# Altium PCB PCB_V1.0.PcbDoc
Units mil, origin at the board's own origin, x right, y up, seen from the top; angles counter-clockwise.
Board outline 3020.03 x 3470.03 mil, 2 copper layers (Top Layer, Bottom Layer), stack 30.315 mil thick; 62 components, 47 nets, 185 pads, 22 vias.
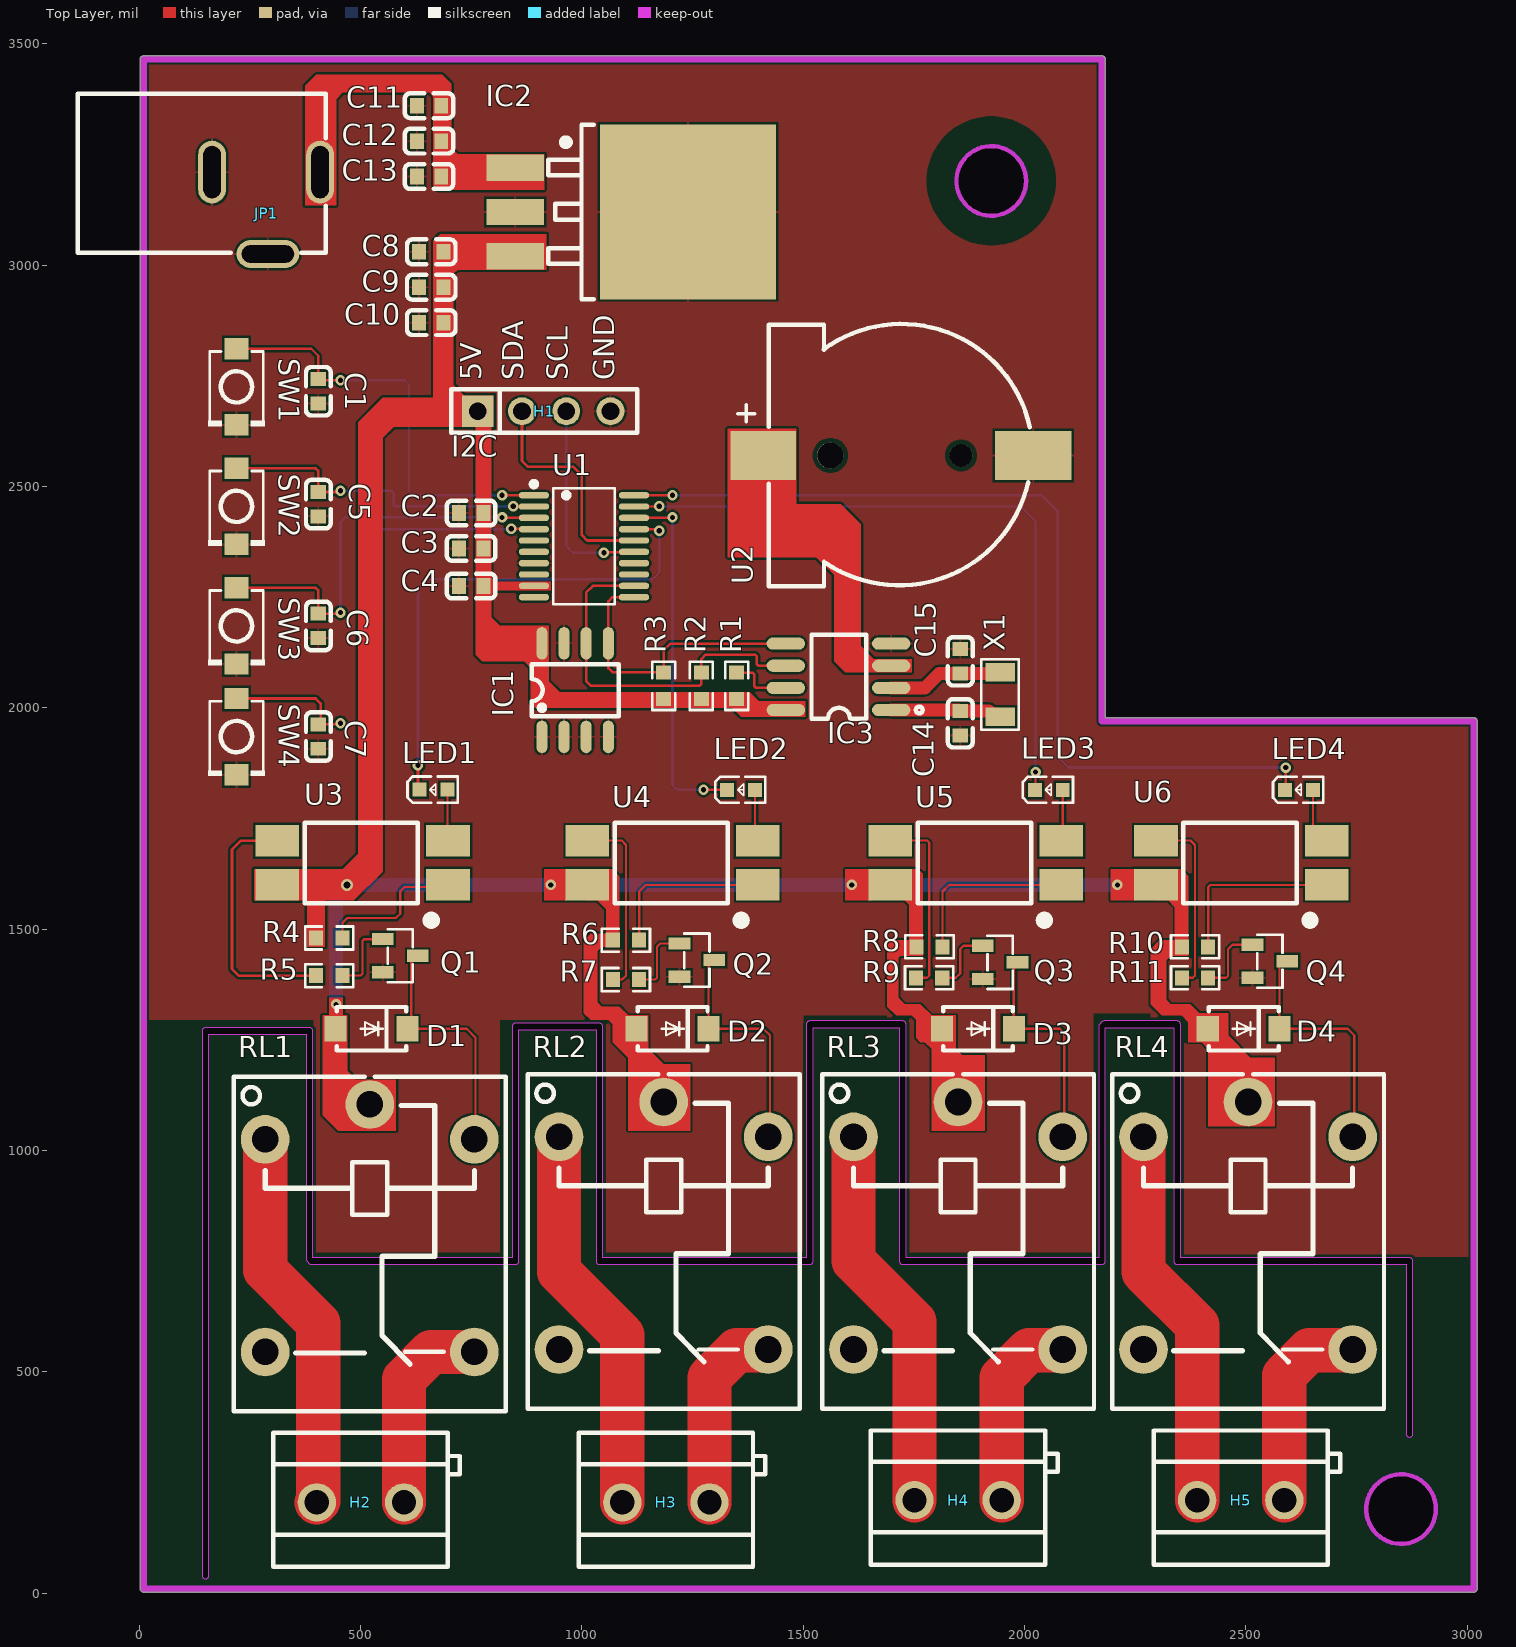
[diagram p0: Top Layer view]
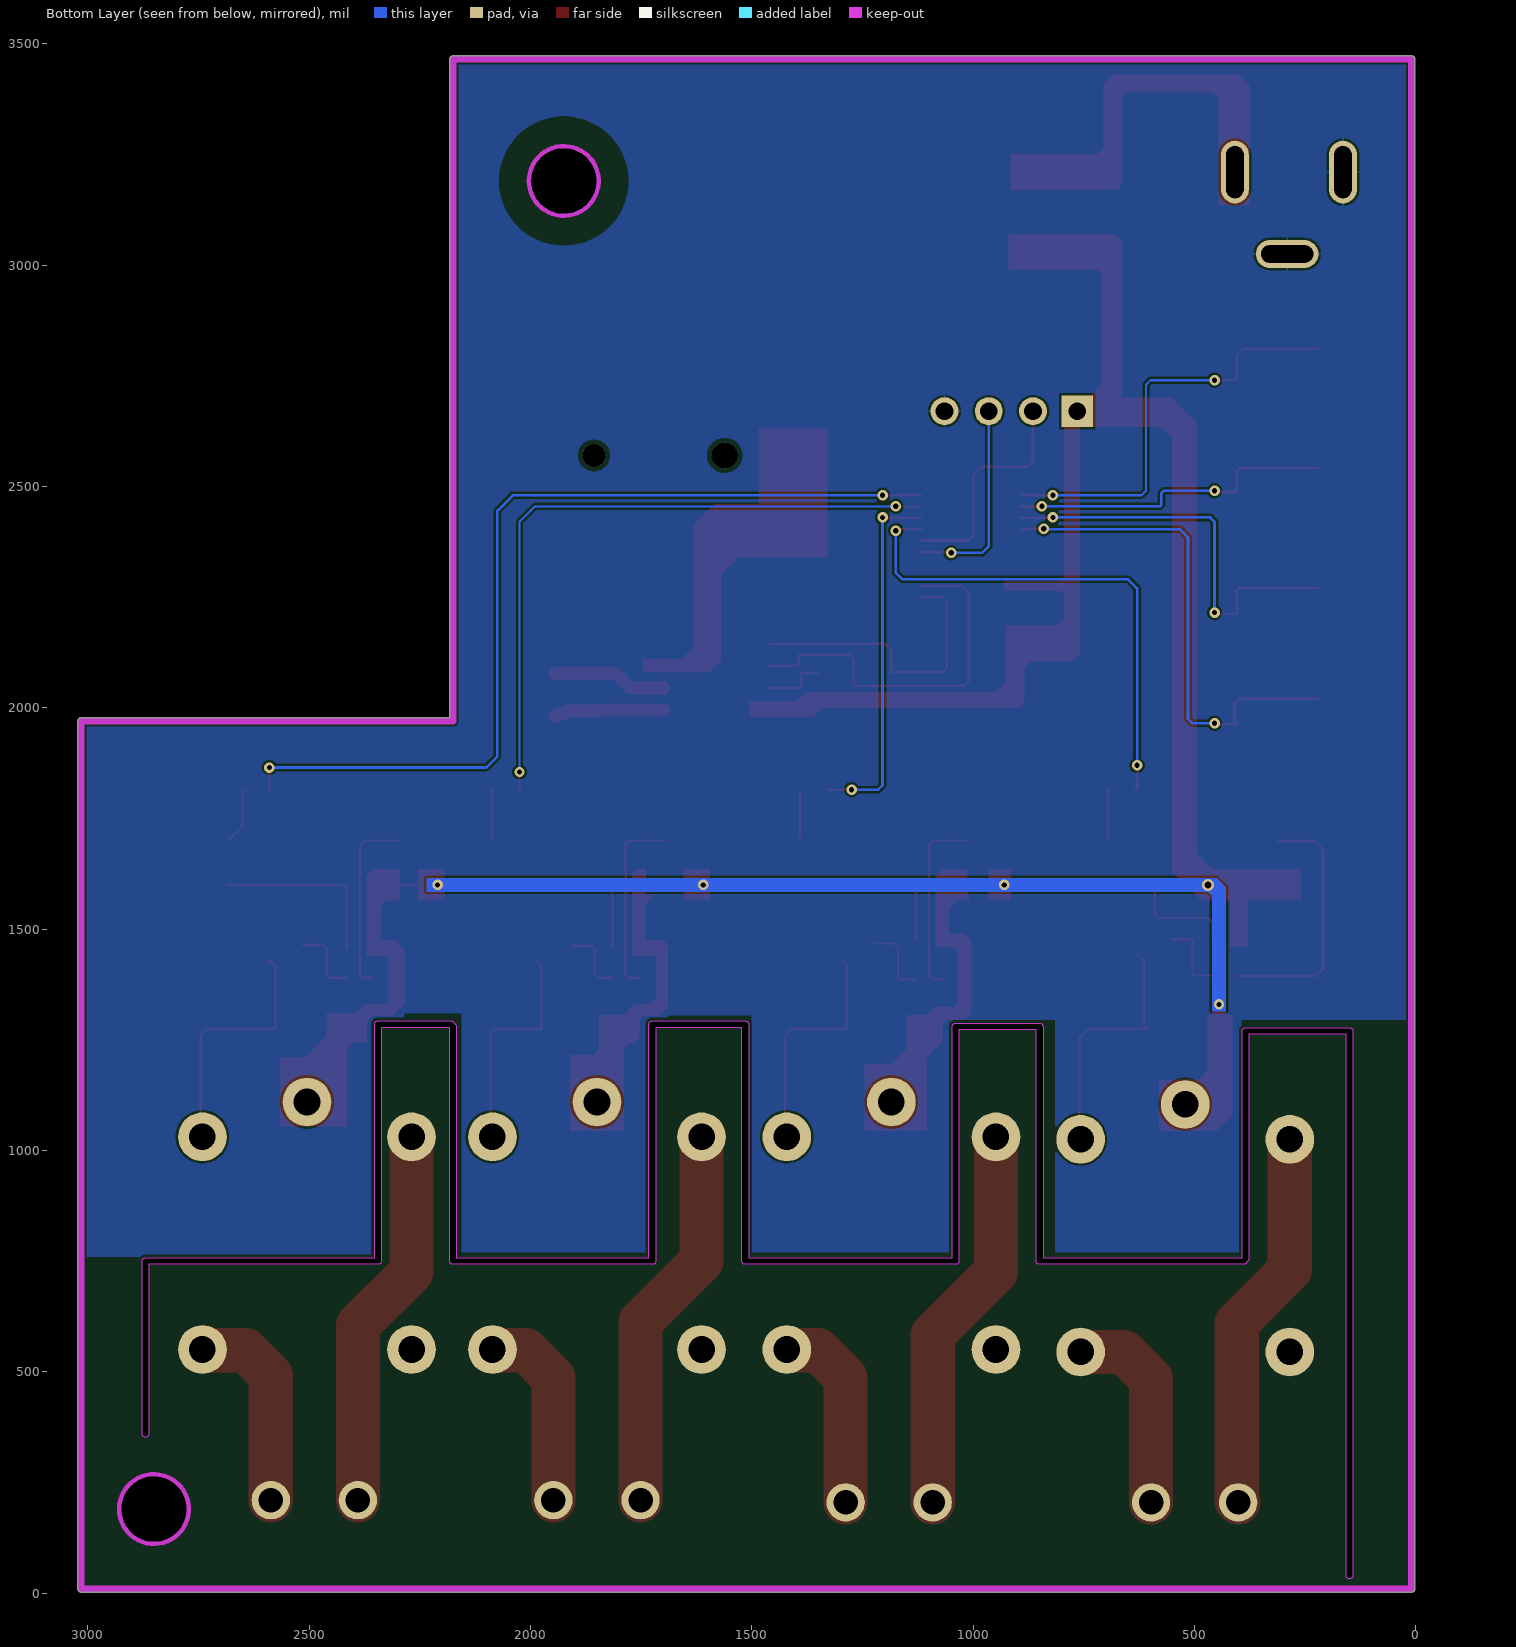
[diagram p1: Bottom Layer view, seen from below]
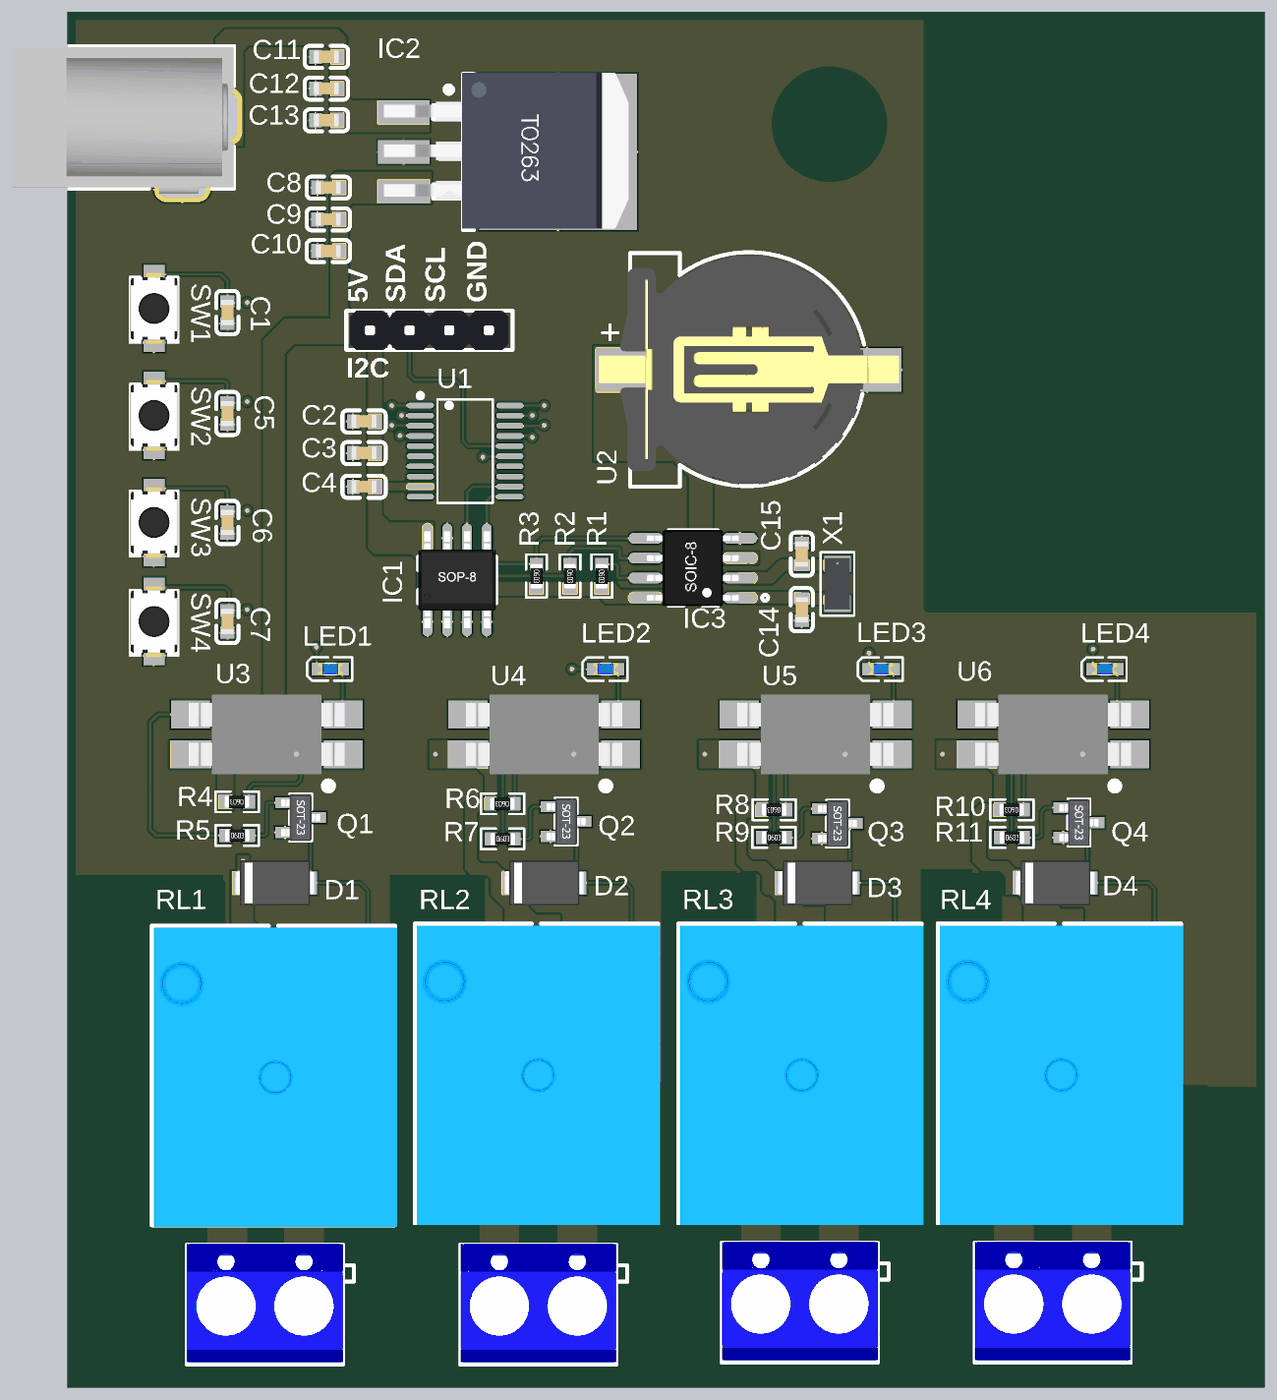
[diagram p2: 3D render of the assembled board from above, using the file's embedded part models]

## Layer stack, top to bottom
Top Solder: solder mask 0.5, Solder Resist, Dk 3.8
Top Layer: signal copper 1.378
Dielectric: core 27.559, FR-4, Dk 4.5
Bottom Layer: signal copper 1.378
Bottom Solder: solder mask 0.5, Solder Resist, Dk 3.8

## Board outline
10,2.48 cw(c10,10) 2.49,10 2.48,3465 cw(c10,3465) 10,3472.52 2175,3472.52 cw(c2175,3465) 2182.51,3465 2182.51,1977.51 3015,1977.51 cw(c3015,1970) 3022.51,1970 3022.51,10 cw(c3015,10) 3015,2.48
cut-out: 142.49,40 ccw(c150,40) 157.51,40 157.51,1262.49 377.48,1262.49 377.48,755 ccw(c385,755) 379.69,749.69 384.69,744.68 ccw(c389.99,749.99) 390,742.49 850,742.49 ccw(c850,750) 857.52,750 857.52,1272.49 1032.48,1272.49 1032.48,750 ccw(c1040,750) 1040,742.49 1515,742.49 ccw(c1515,750) 1522.51,750 1522.51,1277.49 1717.49,1277.49 1717.49,750 ccw(c1725,750) 1725,742.49 2175,742.49 ccw(c2175,750) 2182.51,750 2182.51,1276.89 2183.11,1277.49 2337.49,1277.49 2337.49,750 ccw(c2345,750) 2345,742.49 2862.49,742.49 2862.49,360 ccw(c2870,360) 2877.51,360 2877.51,750 ccw(c2870,750) 2870,757.51 2352.51,757.51 2352.51,1285 ccw(c2345,1285) 2345,1292.51 2180,1292.51 ccw(c2180,1285.01) 2174.69,1290.31 2169.68,1285.3 ccw(c2174.98,1280.01) 2167.49,1280 2167.49,757.51 1732.51,757.51 1732.51,1285 ccw(c1725,1285) 1725,1292.51 1515,1292.51 ccw(c1515,1285) 1507.49,1285 1507.49,757.51 1047.52,757.51 1047.52,1280 ccw(c1040,1280) 1040,1287.51 850,1287.51 ccw(c850,1280) 842.48,1280 842.48,757.51 393.11,757.51 392.52,758.11 392.52,1270 ccw(c385,1270) 385,1277.51 150,1277.51 ccw(c150,1270) 142.49,1270
cut-out: 2771.92,190.05 ccw(c2850.66,190.05) 2850.66,111.31 ccw(c2850.66,190.05) 2929.4,190.05 ccw(c2850.66,190.05) 2850.66,268.79 ccw(c2850.66,190.05)
cut-out: 1925,3111.26 cw(c1925,3190) 1846.26,3190 cw(c1925,3190) 1925,3268.74 cw(c1925,3190) 2003.74,3190 cw(c1925,3190)

## Design rules (kind name [scope] priority, off if disabled: settings)
BoardOutlineClearance [All] p1: gap=7.87 ignorepadtopadclearanceinfootprint=FALSE
Clearance [All] p1: gap=5 ignorepadtopadclearanceinfootprint=FALSE except(9.84: Arc-Hole Track-Hole SMDPad-Hole THPad-Hole Via-Hole Fill-Hole Poly-Hole Region-Hole Text-Hole)
ComponentClearance [All] p1: gap=5 collisioncheckmode=3 verticalgap=5 showdistances=TRUE
DiffPairsRouting [All] p1: maxlimit=10 minlimit=5 mostfreqgap=5 toplayer_minwidth=5 toplayer_maxwidth=1000 toplayer_prefwidth=5 bottomlayer_minwidth=5 bottomlayer_maxwidth=1000 bottomlayer_prefwidth=5 maxuncoupledlength=500
Height [All] p1: minheight=0 maxheight=71497.94 prefheight=500
HoleSize [All] p1: absolutevalues=TRUE maxlimit=248.03 minlimit=11.81 maxpercent=80.000 minpercent=20.000
HoleToHoleClearance [All] p1: gap=9.84 allowstackedmicrovias=FALSE
MinimumAnnularRing [All] p1: minimumring=3
MinimumSolderMaskSliver [All] p1: minsoldermaskwidth=0
PlaneClearance [All] p1: clearance=5
PlaneConnect PlaneConnectPowerPads [InPadClass('PowerPads')] p1: planeconnectstyle=Direct reliefexpansion=20 reliefentries=4 reliefconductorwidth=10 reliefairgap=10
PlaneConnect [All] p2: pad.planeconnectstyle=Relief pad.reliefexpansion=11.81 pad.reliefentries=4 pad.reliefconductorwidth=5 pad.reliefairgap=5 via.planeconnectstyle=Direct via.reliefexpansion=11.81 via.reliefentries=4 via.reliefconductorwidth=5 via.reliefairgap=5
PolygonConnect PolygonConnectPowerPads [All vs (InPadClass('PowerPads'))] p1: connectstyle=Direct reliefconductorwidth=10 reliefentries=4 polygonreliefangle="90 Angle" airgapwidth=10
PolygonConnect [All] p2: thpad.connectstyle=Relief thpad.reliefconductorwidth=5 thpad.reliefentries=4 thpad.polygonreliefangle="90 Angle" thpad.airgapwidth=5 smdpad.connectstyle=Relief smdpad.reliefconductorwidth=5 smdpad.reliefentries=4 smdpad.polygonreliefangle="90 Angle" smdpad.airgapwidth=5 via.connectstyle=Direct via.reliefconductorwidth=5 via.reliefentries=4 via.polygonreliefangle="90 Angle" via.airgapwidth=5
RoutingVias [All] p1: holewidth=11.81 width=23.62 viastyle="Through Hole" minholewidth=11.81 minwidth=23.62 maxholewidth=23.62 maxwidth=259.84
SilkToSilkClearance [All] p1: silktosilkclearance=0
SilkToSolderMaskClearance [IsPad] p1: minsilkscreentomaskgap=5 clearancetoexposedcopper=TRUE
SolderMaskExpansion [All] p1: expansion=2.95 istentingtop=FALSE
Width [All] p1: maxlimit=1000 minlimit=5 preferedwidth=5 minimp=50.000000 maximp=50.000000 favimp=50.000000
20 further rules are at their usual default settings.

## Classes and differential pairs
component class RELAY: D1 D2 D3 D4 H2 H3 H4 H5 LED1 LED2 LED3 LED4 Q1 Q2 Q3 Q4 R4 R5 R6 R7 R8 R9 R10 R11 RL1 RL2 RL3 RL4 U3 U4 U5 U6
component class POWER_SUPPLY: C8 C9 C10 C11 C12 C13 IC2 JP1
component class MCU: C1 C2 C3 C4 C5 C6 C7 H1 SW1 SW2 SW3 SW4 U1
component class DS1307: C14 C15 IC3 R1 R2 R3 U2 X1

## Components (designator, comment, footprint, x,y, rotation, side; value= is the part's Value field where it differs from the comment)
C1 "10uF" C0603 405,2715 r270 top
C2 "10nF" C0603 750,2440 r0 top
C3 "10uF" C0603 750,2360 r0 top
C4 "10pF" C0603 750,2275 r0 top
C5 "10uF" C0603 405,2460 r270 top
C6 "10uF" C0603 405,2185 r270 top
C7 "10uF" C0603 405,1935 r270 top
C8 "10uF" C0603 660,3030 r0 top
C9 "100nF" C0603 660,2950 r0 top
C10 "10pF" C0603 660,2870 r0 top
C11 "10uF" C0603 655,3360 r0 top
C12 "100nF" C0603 655,3280 r0 top
C13 "10pF" C0603 655,3200 r0 top
C14 "33pF" C0603 1855,1965 r270 top
C15 "33pF" C0603 1855,2105 r90 top
D1 "1N4007_M7" SMA(DO-214AC) 525,1275 r0 top
D2 "1N4007_M7" SMA(DO-214AC) 1205,1275 r0 top
D3 "1N4007_M7" SMA(DO-214AC) 1895,1275 r0 top
D4 "1N4007_M7" SMA(DO-214AC) 2495,1275 r0 top
H1 "4P_2.54mm_Male_Header" "4P, 2,54mm, MALE HEADER" 915,2670 r0 top
H2 "KF301-5.0-2P" CONN-TH_P5.00_KF301-5.0-2P 500,205 r0 top
H3 "KF301-5.0-2P" CONN-TH_P5.00_KF301-5.0-2P 1190,205 r0 top
H4 "KF301-5.0-2P" CONN-TH_P5.00_KF301-5.0-2P 1850,210 r0 top
H5 "KF301-5.0-2P" CONN-TH_P5.00_KF301-5.0-2P 2488.43,210 r0 top
IC1 "AT24C02_SOP8" SOP-8 985,2040 r0 top
IC2 "LM7805" TO-263-3L 1240.91,3118 r0 top
IC3 "DS1307" SOIC-8 1580,2070 r180 top
JP1 "DC_POWER_JACK" DC_POWER_JACK_6.3mm_2.1mm 165,3210 r0 top
LED1 "Blue" LED0603_BLUE 665,1815 r180 top
LED2 "Blue" LED0603_BLUE 1360,1814.58 r180 top
LED3 "Blue" LED0603_BLUE 2055,1814.58 r180 top
LED4 "Blue" LED0603_BLUE 2620,1814.58 r180 top
Q1 "BC817" SOT-23 590,1440 r180 top
Q2 "BC817" SOT-23 1260,1430 r180 top
Q3 "BC817" SOT-23 1945,1425 r180 top
Q4 "BC817" SOT-23 2554.37,1427.4 r180 top
R1 "4.7kΩ" R0603 1323.99,2104.19 r270 top
R2 "4.7kΩ" R0603 1243.99,2104.19 r270 top
R3 "4.7kΩ" R0603 1158.99,2104.19 r270 top
R4 "330Ω" R0603 484.19,1506.01 r180 top
R5 "1kΩ" R0603 375.12,1368.99 r0 top
R6 "330Ω" R0603 1154.19,1501.01 r180 top
R7 "1kΩ" R0603 1045.18,1360.08 r0 top
R8 "330Ω" R0603 1839.88,1486.01 r180 top
R9 "1kΩ" R0603 1730.12,1363.99 r0 top
R10 "330Ω" R0603 2439.88,1486.01 r180 top
R11 "1kΩ" R0603 2330.81,1363.99 r0 top
RL1 "SRD-05VDC-SL-C" "Through Hole,15.6x19.2mm" 521.2,824.53 r270 top
RL2 "SRD-05VDC-SL-C" "Through Hole,15.6x19.2mm" 1185,830 r270 top
RL3 "SRD-05VDC-SL-C" "Through Hole,15.6x19.2mm" 1850,830 r270 top
RL4 "SRD-05VDC-SL-C" "Through Hole,15.6x19.2mm" 2505,830 r270 top
SW1 "SMD 3mm×4mm" "ROUND_BUTTON_SMD 3*4mm" 220,2725 r270 top
SW2 "SMD 3mm×4mm" "ROUND_BUTTON_SMD 3*4mm" 220,2455 r270 top
SW3 "SMD 3mm×4mm" "ROUND_BUTTON_SMD 3*4mm" 220,2185 r270 top
SW4 "SMD 3mm×4mm" "ROUND_BUTTON_SMD 3*4mm" 220,1935 r270 top
U1 "CH32V003F4P6" TSSOP-20 1005,2365 r270 top
U2 "3V_COIN_BATTERY_HOLDER" 3V_COIN_BATERRY_HOLDER_CR1220 1715,2570 r180 top
U3 "PC817CS" SOP-4 505,1650 r90 top
U4 "PC817CS" SOP-4 1205,1650 r90 top
U5 "PC817CS" SOP-4 1890,1650 r90 top
U6 "PC817CS" SOP-4 2490,1650 r90 top
X1 "32.768kHz" SMD3215-2P 1945,2030 r270 top

## Footprints (in the part's own frame and the unit in brackets; to place one, negate y for a bottom-side part, rotate by r counter-clockwise, add the part's x,y. Pads: shape width x height; smd on the part's side, far side on the other; paste and mask are expansions set on the pad)
3V_COIN_BATERRY_HOLDER_CR1220 [mm]
  rect 3.75x2.8 smd paste+0 mask+0.051: 1(7.75,0)
  rect 4.4x2.8 smd paste+0 mask+0.051: 2(-7.75,0)
  round 1.3 hole 1.3 unplated paste-2539.97: ""(-3.6,0)
  round 1.5 hole 1.5 unplated paste-2539.97: ""(3.9,0)
  silkscreen extent -7.55,-7.54 9.22,7.49, body extent -9.78,-7.4 9.42,7.35, height 4.25
"4P, 2,54mm, MALE HEADER" [mm]
  rect 1.8x1.8 hole 1.02 paste-2539.97 mask+0.051: 1(-3.81,0)
  round 1.6 hole 1.02 paste-2539.97 mask+0.051: 2(-1.27,0) 3(1.27,0) 4(3.81,0)
  silkscreen extent -5.33,-1.25 5.33,1.25, body extent -5.08,-1.27 5.08,1.27, height 8.34
C0603 [mm]
  rect 0.8x0.9 smd paste+0 mask+0.051: 1(-0.7,0) 2(0.7,0)
  silkscreen extent -1.39,-0.71 1.39,0.71, body extent -0.8,-0.39 0.8,0.41, height 0.8
CONN-TH_P5.00_KF301-5.0-2P [mm]
  round 2.2 hole 1.4 paste-2539.97 mask+0.051: 1(-2.5,0) 2(2.5,0)
  silkscreen extent -5,-3.7 5.71,4, body extent -5,-3.55 5,4.05, height 10
DC_POWER_JACK_6.3mm_2.1mm [mm]
  oval 1.6x3.6 hole 1 slot 3 at 90 deg paste-2539.97 mask+0.051: 1(6.2,0) 2(0,0)
  oval 3.6x1.6 hole 1 slot 3 at 0 deg paste-2539.97 mask+0.051: 3(3.2,-4.7)
  silkscreen extent -7.7,-4.64 6.52,4.51, body extent -7.72,-4.95 6.48,4.45, height 11.09
LED0603_BLUE [mm]
  rect 0.8x0.8 smd paste+0 mask+0.051: 1(-0.799,0) 2(0.799,0)
  silkscreen extent -1.39,-0.76 1.49,0.75, body extent -0.8,-0.4 0.8,0.4, height 0.6
R0603 [mil]
  rect 31.75x34.02 smd paste+0 mask+2: 1(24.88,26.01) 2(84.19,26.01)
  silkscreen extent 0,0 109,52, body extent 24,10 86,42, height 18
"ROUND_BUTTON_SMD 3*4mm" [mm]
  rect 1.23x1.36 smd paste+0 mask+0.051: 1(-2.185,0) 2(2.185,0)
  silkscreen extent -2.03,-1.62 2.25,1.62, body extent -2.25,-1.55 2.25,1.55, height 2.05
SMA(DO-214AC) [mil]
  rect 50x57.9 smd paste+0 mask+2: 1(-81,0) 2(81,0)
  silkscreen extent -78,-49 79,49, body extent -102,-57 102,57, height 91
SMD3215-2P [mm]
  rect 1.05x1.7 smd paste+0 mask+0.051: 1(-1.27,0) 2(1.27,0)
  silkscreen extent -2.03,-1.08 2.03,1.08, body extent -1.65,-0.8 1.65,0.8, height 0.89
SOIC-8 [mm]
  oval 2.2x0.7 smd paste+0 mask+0.051: 1(-3.023,1.905) 2(-3.023,0.635) 3(-3.023,-0.635) 4(-3.023,-1.905) 5(3.023,-1.905) 6(3.023,-0.635) 7(3.023,0.635) 8(3.023,1.905)
  silkscreen extent -4.82,-2.41 1.55,2.41, body extent -2.95,-2.45 2.95,2.45, height 1.52
SOP-4 [mm]
  rect 1.8x2.5 smd paste+0 mask+0.051: 1(-1.27,-4.9) 2(1.27,-4.9) 3(1.27,4.9) 4(-1.27,4.9)
  silkscreen extent -3.79,-4.42 2.29,3.32, body extent -2.54,-4.99 2.54,5.02, height 4.6
SOP-8 [mm]
  oval 0.63x1.865 smd paste+0 mask+0.051: 1(-1.905,-2.682) 2(-0.635,-2.682) 3(0.635,-2.682) 4(1.905,-2.682) 5(1.905,2.682) 6(0.635,2.682) 7(-0.635,2.682) 8(-1.905,2.682)
  silkscreen extent -2.5,-1.5 2.5,1.48, body extent -2.5,-3.11 2.5,3.11, height 1.87
SOT-23 [mm]
  rect 1.25x0.7 smd: 1(1,-0.95) 2(1,0.95) 3(-1,0)
  silkscreen extent -0.73,-1.53 0.73,1.53, body extent -1.25,-1.5 1.25,1.5, height 1.1
"Through Hole,15.6x19.2mm" [mil]
  round 110 hole 60 paste-99999 mask+2: 1(-200.79,-236.22) 2(279.53,-236.2) 3(279.53,236.2) 4(-200.79,236.22) 5(-279.53,0)
  silkscreen extent -342,-307 413,307, body extent -338,-302 418,312, height 622
TO-263-3L [mil]
  rect 129.92x59.49 smd paste+0 mask+2: 1(-390.91,102) 2(-390.91,2) 3(-390.91,-98)
  rect 398.5x394.49 smd paste+0 mask+2: 4(-1,2)
  silkscreen extent -316,-195 -214,199, body extent -440,-192 176,202, height 189
TSSOP-20 [mm]
  oval 0.364x1.742 smd paste+0 mask+0.051: 1(-2.925,-2.871) 2(-2.275,-2.871) 3(-1.625,-2.871) 4(-0.975,-2.871) 5(-0.325,-2.871) 6(0.325,-2.871) 7(0.975,-2.871) 8(1.625,-2.871) 9(2.275,-2.871) 10(2.925,-2.871) 11(2.925,2.871) 12(2.275,2.871) 13(1.625,2.871) 14(0.975,2.871) 15(0.325,2.871) 16(-0.325,2.871) 17(-0.975,2.871) 18(-1.625,2.871) 19(-2.275,2.871) 20(-2.925,2.871)
  silkscreen extent -3.71,-3.02 3.33,1.77, body extent -3.23,-3.25 3.27,3.17, height 1.29

## Part data
C1 C3 C5 C6 C7 C8 C11: library part C0603_MLCC_10uF_X5R_25V, "25V 10uF X5R ±20% 0603 Multilayer Ceramic Capacitors MLCC - SMD/SMT ROHS", LCSC Part=C596327, Manufacturer=YAGEO, Mfr. Part=CC0603MRX5R8BB106, Package=0603, Temperature Coefficient="X5R, 25V", Tolerance=±20%, Voltage Rating=25V, Capacitance=10uF, Link=https://www.lcsc.com/product-detail/C596327.html
C2: library part C0603_MLCC_10nF_X7R_50V, "50V 10nF X7R ±10% 0603 Multilayer Ceramic Capacitors MLCC - SMD/SMT ROHS", LCSC Part=C100042, Manufacturer=YAGEO, Mfr. Part=CC0603KRX7R9BB103, Package=0603, Temperature Coefficient="X7R, 50V", Tolerance=±10%, Voltage Rating=50V, Capacitance=10nF, Link=https://www.lcsc.com/product-detail/C100042.html
C4 C10 C13: library part C0603_MLCC_10pF_NP0_50V, "50V 10pF NP0 ±5% 0603 Multilayer Ceramic Capacitors MLCC - SMD/SMT ROHS", LCSC Part=C106245, Manufacturer=YAGEO, Mfr. Part=CC0603JRNPO9BN100, Package=0603, Temperature Coefficient="NP0, 50V", Tolerance=±5%, Voltage Rating=50V, Capacitance=10pF, Link=https://www.lcsc.com/product-detail/C106245.html
C9 C12: library part C0603_MLCC_100nF_X7R_50V, "50V 100nF X7R ±10% 0603 Multilayer Ceramic Capacitors MLCC - SMD/SMT ROHS", LCSC Part=C14663, Manufacturer=YAGEO, Mfr. Part=CC0603KRX7R9BB104, Package=0603, Temperature Coefficient="X7R, 50V", Tolerance=±10%, Voltage Rating=50V, Capacitance=100nF, Link=https://www.lcsc.com/product-detail/C14663.html
C14 C15: library part C0603_MLCC_33pF_NP0_50V, "50V 33pF NP0 ±5% 0603 Multilayer Ceramic Capacitors MLCC - SMD/SMT ROHS", LCSC Part=C107047, Manufacturer=YAGEO, Mfr. Part=CC0603JRNPO9BN330, Package=0603, Temperature Coefficient="NP0, 50V", Tolerance=±5%, Voltage Rating=50V, Capacitance=33pF, Link=https://www.lcsc.com/product-detail/C107047.html
D1 D2 D3 D4: "1A 1V@1A 1kV SMA Diodes - General Purpose ROHS", LCSC Part=C20754788, Manufacturer=JSMSEMI, Mfr. Part="1N4007 M7", Package=SMA, Link=https://www.lcsc.com/product-detail/C20754788.html?s_z=n_1N4007
H1: "4P 1x4P -40℃~+105℃ Black Pin Header 2.54mm 2.5mm 6mm 250V 3mm 1 Through Hole Through Hole,P=2.54mm Headers, Male Pins ROHS", LCSC Part=C2691448, Manufacturer=XFCN, Mfr. Part=PZ254V-11-04P, Package="Through Hole,P=2.54mm", Holes Structure=1x4P, Link=https://www.lcsc.com/product-detail/C2691448.html, Pitch=2.54mm
H2 H3 H4 H5: "1x2P -30℃~+120℃ 17A 250V Blue 14~22 Through Hole 5mm 1.5 1 2 Through Hole,P=5mm Screw Terminal Blocks ROHS", Color=Blue, LCSC Part=C474881, Manufacturer="Cixi Kefa Elec", Package="Through Hole,P=5mm", Category="Connectors/Screw Terminal Blocks", Link=https://www.lcsc.com/product-detail/C474881.html, Mfr. Part=KF301-5.0-2P
IC1: "2Kbit 1.8V~5.5V 1MHz I2C SOP-8 Memory (ICs) ROHS", Clock Frequency=1MHz, LCSC Part=C688857, Manufacturer=IDCHIP, Mfr. Part=AT24C02, Operating Temperature=-40℃~+85℃, Package=SOP-8, Voltage - Supply=1.8V~5.5V, Data Retention - TDR (Year)="100 Years", Interface=I2C, Key Attributes="24C02 2K-bit Electrically Erasable PROM", Link=https://www.lcsc.com/product-detail/C688857.html?s_z=n_AT24C02%2520-%2520TSSOP8, Memory Size=2Kbit, Write Cycle Endurance="1,000,000 Cycles", Write Cycle Time(tWC)=5ms
IC2: library part LM7805_TO-263-3L, "62dB@(120Hz) 1A Fixed 4.8V~5.2V Positive 35V TO-263-3L Voltage Regulators - Linear, Low Drop Out (LDO) Regulators ROHS", LCSC Part=C5145372, Manufacturer="HANSCHIP semiconductor", Mfr. Part=LM7805SRG, Operating Temperature=-40℃~+85℃@(Ta), Output Current=1A, Output Voltage=4.8V~5.2V, Package=TO-263-3L, Voltage - Supply=35V, Category="Power Management (PMIC)/Voltage Regulators - Linear, Low Drop Out (LDO) Regulators", Link=https://www.lcsc.com/product-detail/C5145372.html?s_z=n_lm7805, Number of Outputs=1, Output Configuration=Positive
IC3: library part DS1307-SOIC8, "I2C SOIC-8 Real Time Clocks ROHS", LCSC Part=C9868, Manufacturer=MAXIM, Mfr. Part=DS1307Z+T&R, Package=SOIC-8, Interface=I2C, Key Attributes="64 x 8, Serial, I²C Real-Time Clock", Link=https://www.lcsc.com/product-detail/C9868.html?s_z=n_DS1307
JP1: library part DC_POWER_JACK_6.3mm_2.1mm, "Right Angle DC Power Jack -40℃~+85℃ 2.1mm 6.3mm 3A 500V Through Hole DC Power Connectors ROHS", Current Rating=3A, LCSC Part=C7498153, Manufacturer="Lian Xin Technology", Mfr. Part=XDJK-0051-025, Operating Temperature=-40℃~+85℃, Package="Through Hole", Voltage Rating (Max)=500V, Connector Type="DC Power Jack", Current Rating-Power=3A, Inside Contact Diameter=2.1mm, Link=https://www.lcsc.com/product-detail/C7498153.html?s_z=n_XDJK-0051-025, Outside Contact Diameter=6.3mm, Reference=6.3mm_2.1mm
LED1 LED2 LED3 LED4: library part LED0603_Blue, "2mA 24mcd Water Clear -40℃~+85℃ 470nm Blue 130° 120mW 2.65V 0603 LED Indication - Discrete ROHS", Forward Current=2mA, LCSC Part=C5200747, Manufacturer=Kingbright, Mfr. Part=APT1608LVBC/D, Operating Temperature=-40℃~+85℃, Package=0603, Power(Watts)=120mW, Voltage - Forward(Vf)=2.65V, Illumination Color=Blue, Key Attributes="1.6 x 0.8 mm SMD Chip LED Lamp", Link=https://www.lcsc.com/product-detail/C5200747.html
Q1 Q2 Q3 Q4: "345mW 45V 250@100mA,1V 500mA NPN SOT-23 Single Bipolar Transistors ROHS", Current - Collector(Ic)=500mA, LCSC Part=C52801, Manufacturer=Nexperia, Mfr. Part=BC817-40,215, Operating Temperature=-65℃~+150℃, Package=SOT-23, Pd - Power Dissipation=345mW, Transition frequency(fT)=100MHz, Category=BJT, Link=https://www.lcsc.com/product-detail/C52801.html?s_z=n_NPN, Type=NPN, Vce Saturation(VCE(sat))=700mV
R1 R2 R3: library part R0603_4.7kΩ_±1%, "100mW Thick Film Resistor 75V ±100ppm/℃ ±1% 4.7kΩ 0603 Chip Resistor - Surface Mount ROHS", LCSC Part=C99782, Manufacturer=YAGEO, Mfr. Part=RC0603FR-074K7L, Operating Temperature=-55℃~+155℃, Package=0603, Tolerance=±1%, Link=https://www.lcsc.com/product-detail/C99782.html, Resistance=4.7kΩ
R4 R6 R8 R10: library part R0603_330Ω_±1%, "100mW Thick Film Resistor 75V ±100ppm/℃ ±1% 330Ω 0603 Chip Resistor - Surface Mount ROHS", LCSC Part=C105881, Manufacturer=YAGEO, Mfr. Part=RC0603FR-07330RL, Operating Temperature=-55℃~+155℃, Package=0603, Tolerance=±1%, Link=https://www.lcsc.com/product-detail/C105881.html, Resistance=330Ω
R5 R7 R9 R11: library part R0603_1kΩ_±1%, "100mW Thick Film Resistor 75V ±100ppm/℃ ±1% 1kΩ 0603 Chip Resistor - Surface Mount ROHS", LCSC Part=C22548, Manufacturer=YAGEO, Mfr. Part=RC0603FR-071KL, Operating Temperature=-55℃~+155℃, Package=0603, Tolerance=±1%, Link=https://www.lcsc.com/product-detail/C22548.html, Resistance=1kΩ
RL1 RL2 RL3 RL4: "250V@AC 5V 15A 1 Form C: 1C (SPDT-CO) Through Hole,15.6x19.2mm Power Relays ROHS", Coil Voltage=5V, LCSC Part=C35449, Manufacturer="Songle Relay", Package="Through Hole,15.6x19.2mm", Switching Current(Max)=15A, Switching Voltage(Max)=250V@AC, Link=https://www.lcsc.com/product-detail/C35449.html?s_z=n_relay, Mfr. Part=SRD-05VDC-SL-C, Number of Pins=5
SW1 SW2 SW3 SW4: library part SW_BUTTON_SMD_3mm×4mm, "Without Bracket 50mA 4mm 100,000 Cycles 12V 1.6N 3mm 2mm Round Button Surface Mount,Vertical SPST SMD Tactile Switches ROHS", LCSC Part=C720477, Manufacturer=XUNPU, Mfr. Part=TS-1088-AR02016, Operating Temperature=-30℃~+80℃, Package=SMD, Voltage Rating=12V, Length=4mm, Link=https://www.lcsc.com/product-detail/C720477.html?s_z=n_Button, Width=3mm
U1: library part CH32V003F4P6_TSSOP-20-175mil, "TSSOP-20-175mil Microcontrollers (MCU/MPU/SOC) ROHS", LCSC Part=C5187096, Manufacturer=WCH, Package=TSSOP-20-175mil, Link=https://www.lcsc.com/product-detail/C5187096.html?s_z=n_CH32V003F4P6, Mfr. Part=CH32V003F4P6
U2: "Battery Holder -25℃~+85℃ Phosphor Bronze CR1220 SMD Button And Strip Battery Connector ROHS", LCSC Part=C964723, Manufacturer=MYOUNG, Mfr. Part=BS-12-B3AA003, Package=SMD, Battery Type=CR1220, Link=https://www.lcsc.com/product-detail/C964723.html
U3 U4 U5 U6: "50mA 200mV@1mA,20mA 80V 6V 1.2V DC SOP-4 Transistor, Photovoltaic Output Optoisolators ROHS", LCSC Part=C20612591, Manufacturer=AOTE, Package=SOP-4, Category="Isolators/Optocouplers, Optoisolators/Transistor, Photovoltaic Output Optoisolators", Key Attributes="OPTOISOLATOR 5kV 1CH TRANS SOP-4", Link=https://www.lcsc.com/product-detail/C20612591.html?s_z=n_pc817, Mfr. Part=PC817CS
X1: library part Crystal_32.768Khz, "32.768kHz 12.5pF ±20ppm SMD3215-2P Crystals ROHS", Frequency Stability=-, LCSC Part=C156245, Load Capacitance=12.5pF, Manufacturer=NDK, Mfr. Part=NX3215SA-32.768K-STD-MUA-8, Operating Temperature=-40℃~+85℃, Package=SMD3215-2P, Frequency=32.768kHz, Link=https://www.lcsc.com/product-detail/C156245.html?s_z=n_Crystal%252032%252C768kHz, Type=-

## Via types
v1: diameter 23.62, hole 11.81, Top Layer to Bottom Layer, tented both sides, 21 vias
v2: diameter 27.56, hole 15.75, Top Layer to Bottom Layer, tented both sides, 1 vias

## Nets (pads, with @x,y where several pads share a name; then routed paths per layer and width w, separated by ;. In a path a pad name is that pad's centre, name@x,y a point inside that pad or via, vN(x,y) a via of type N, cw(c..) or ccw(c..) an arc to the next point about the centre after c; other vN are vias at no path point)
+5V: C2.2 C3.2 C4.2 C8.2 C9.2 C10.2 D1.1 D2.1 D3.1 D4.1 H1.1 IC1.8 IC2.3 IC3.8 R1.2 R2.2 R3.2 R4.2 R6.2 R8.2 R10.2 RL1.5 RL2.5 RL3.5 RL4.5 U1.9 U3.4 U4.4 U5.4 U6.4 | length 2332
  Top Layer w5.91: D1.1 444,1319 445,1320 v1(445,1330) ; v1(930,1600) U4.4 ; v1(1610,1600) U5.4 ; v1(2210,1600) U6.4
  Bottom Layer w5.91: v1(445,1330) 445,1575 v2(470,1600) v1(930,1600) v1(1610,1600) v1(2210,1600)
BUTTON_1: C1.1 SW1.1 U1.1 | length 980.5
  Top Layer w5: SW1.1 388.98,2811.02 405,2795 C1.1 407.56,2740 v1(455,2740) ; v1(820,2480) 820.08,2480.08 891.89,2480.08 U1.1
  Bottom Layer w5: v1(455,2740) 600,2740 610,2730 610,2490 620,2480 v1(820,2480)
BUTTON_2: C5.1 SW2.1 U1.2 | length 753.1
  Top Layer w5.91: SW2.1 398.98,2541.02 405,2535 C5.1 452.56,2487.55 v1(455,2490) ; v1(845,2455) 845.22,2454.78 891.75,2454.78 U1.2
  Bottom Layer w5.91: v1(455,2490) 570,2490 575,2485 575,2458.46 578.46,2455 v1(845,2455)
BUTTON_3: C6.1 SW3.1 U1.3 | length 937.5
  Top Layer w5.91: SW3.1 398.98,2271.02 405,2265 C6.1 447.56,2212.55 450,2215 v1(455,2215) ; v1(820,2429.88) 820.45,2429.43 891.52,2429.43 U1.3
  Bottom Layer w5.91: v1(455,2215) 455,2420 465,2430 819.88,2430 v1(820,2429.88)
BUTTON_4: C7.1 SW4.1 U1.4 | length 1154.5
  Top Layer w5.91: SW4.1 398.98,2021.02 410,2010 410,1967.55 C7.1 442.56,1962.55 445,1965 v1(455,1965) ; v1(840.81,2404.19) 891.16,2404.19 U1.4
  Bottom Layer w5.91: v1(455,1965) 505,1965 515,1975 515,2385 532.95,2402.95 839.57,2402.95 v1(840.81,2404.19)
GND: C1.2 C2.1 C3.1 C4.1 C5.2 C6.2 C7.2 C8.1 C9.1 C10.1 C11.1 C12.1 C13.1 C14.2 C15.2 H1.4 IC1.1 IC1.2 IC1.3 IC1.4 IC1.7 IC2.2 IC2.4 IC3.4 JP1.2 JP1.3 Q1.2 Q2.2 Q3.2 Q4.2 SW1.2 SW2.2 SW3.2 SW4.2 U1.7 U2.2
NetC11_2: C11.2 C12.2 C13.2 IC2.1 JP1.1
NetC14_1: C14.1 IC3.1 X1.2 | length 246.7
  Top Layer w29: IC3.1 C14.1@1850.48,1995 ; C14.1 1919.65,1992.55 1926.04,1986.17 1938.83,1986.17 X1.2
NetC15_1: C15.1 IC3.2 X1.1 | length 259.4
  Top Layer w29: IC3.2 1775,2045 1807.45,2077.45 X1.1@1945,2077.45
NetD1_2: D1.2 Q1.3 RL1.4 | length 569.5
  Top Layer w5: Q1.3 626.28,1440 615,1428.72 615,1284 D1.2 740,1275 760,1255 760,1027.89 RL1.4
NetD2_2: D2.2 Q2.3 RL2.4 | length 537.8
  Top Layer w5: Q2.3 1297.28,1430 1286,1418.72 D2.2 1410,1275 1425,1260 1425,1034.57 RL2.4
NetD3_2: D3.2 Q3.3 RL3.4 | length 507.4
  Top Layer w5: Q3.3 1976,1416.63 D3.2 2080,1275 2090,1265 2090,1034.57 RL3.4
NetD4_2: D4.2 Q4.3 RL4.4 | length 569.5
  Top Layer w5: Q4.3 2587.28,1427.4 2576,1416.12 D4.2 2730,1275 2745,1260 2745,1034.57 RL4.4
NetH2_1: H2.1 RL1.1 | length 871.4
  Top Layer w100: RL1.1 284.98,730.02 405,610 405,208.42 H2.1
NetH2_2: H2.2 RL1.3 | length 462.9
  Top Layer w100: H2.2 598.42,483.42 660,545 RL1.3
NetH3_1: H3.1 RL2.1 | length 884.9
  Top Layer w100: RL2.1 948.78,726.22 1091.58,583.43 H3.1
NetH3_2: H3.2 RL2.3 | length 441
  Top Layer w100: H3.2 1288.43,486.89 1350.09,548.56 1419.29,548.56 RL2.3
NetH4_1: H4.1 RL3.1 | length 877.9
  Top Layer w100: RL3.1 1613.78,751.22 1751.57,613.43 H4.1
NetH4_2: H4.2 RL3.3 | length 441
  Top Layer w100: H4.2 1948.43,486.89 2010.09,548.56 2084.29,548.56 RL3.3
NetH5_1: H5.1 RL4.1 | length 871
  Top Layer w100: RL4.1 2268.78,726.22 2390,605 H5.1
NetH5_2: H5.2 RL4.3 | length 460.5
  Top Layer w100: H5.2 2586.85,491.89 2643.52,548.56 2739.29,548.56 RL4.3
NetIC3_3: IC3.3 U2.1
NetIC3_7: IC3.7 R1.1 | length 140.8
  Top Layer w5.91: R1.1 1385.69,2079.31 1390,2075 1390,2048.46 1393.46,2045 IC3.7
NetLED1_1: LED1.1 U3.2 | length 115.6
  Top Layer w5: LED1.1 696.48,1701.44 U3.2
NetLED2_1: LED2.1 U4.2 | length 117.2
  Top Layer w5: LED2.1 1391.48,1706.44 U4.2
NetLED3_1: LED3.1 U5.2 | length 116.1
  Top Layer w5: U5.2 2086.48,1703.56 LED3.1
NetLED4_1: LED4.1 U6.2 | length 127.6
  Top Layer w5: LED4.1 2651.48,1731.44 U6.2
NetQ1_1: Q1.1 R5.2 | length 169.1
  Top Layer w5: R5.2 500,1395 505,1400 505,1474.47 507.93,1477.4 Q1.1
NetQ2_1: Q2.1 R7.2 | length 165.9
  Top Layer w5: R7.2 1166.09,1386.09 1170,1390 1170,1460 1177.4,1467.4 Q2.1
NetQ3_1: Q3.1 R9.2 | length 153.5
  Top Layer w5: R9.2 1845,1390 1855,1400 1855,1455 1862.4,1462.4 Q3.1
NetQ4_1: Q4.1 R11.2 | length 166.1
  Top Layer w5: R11.2 2455,1390 2460,1395 2460,1455 2469.8,1464.8 Q4.1
NetR4_1: R4.1 U3.1 | length 337.7
  Top Layer w5: R4.1 459.31,1514.31 470,1525 580,1525 590,1535 590,1585 600,1595 692.91,1595 U3.1
NetR5_1: R5.1 U3.3 | length 576.6
  Top Layer w5.91: U3.3 230,1700 210,1680 210,1410 225,1395 R5.1
NetR6_1: R6.1 U4.1 | length 384.4
  Top Layer w5: R6.1 1130,1475.69 1130,1585 1145,1600 U4.1
NetR7_1: R7.1 U4.3 | length 420.7
  Top Layer w5: U4.3 1090,1700 1100,1690 1100,1395 1091.09,1386.09 R7.1
NetR8_1: R8.1 U5.1 | length 399.1
  Top Layer w5: R8.1 1815,1585 1830,1600 U5.1
NetR9_1: R9.1 U5.3 | length 422.1
  Top Layer w5: U5.3 1780,1700 1785,1695 1785,1395 1780,1390 R9.1
NetR10_1: R10.1 U6.1 | length 405
  Top Layer w5: R10.1 2415,1595 2420,1600 U6.1
NetR11_1: R11.1 U6.3 | length 418.4
  Top Layer w5: U6.3 2375,1700 2385,1690 2385,1395 2380,1390 R11.1
RELAY_1: LED1.2 U1.17 | length 1169.3
  Top Layer w5.91: v1(630,1870) 630,1818.52 LED1.2 ; U1.17 1166.61,2403.39 1170,2400 v1(1175,2400)
  Bottom Layer w5.91: v1(630,1870) 630,2270 650,2290 1160,2290 1175,2305 v1(1175,2400)
RELAY_2: LED2.2 U1.18 | length 820.2
  Top Layer w5.91: U1.18 1203.98,2428.98 v1(1205,2430) ; v1(1275,1815) 1328.1,1815 LED2.2
  Bottom Layer w5.91: v1(1205,2430) 1205,1825 1215,1815 v1(1275,1815)
RELAY_3: LED3.2 U1.19 | length 1527.7
  Top Layer w5: U1.19 1174.57,2454.57 v1(1175,2455) ; LED3.2 2025,1816.05 v1(2025,1855)
  Bottom Layer w5: v1(1175,2455) 1990,2455 2025,2420 v1(2025,1855)
RELAY_4: LED4.2 U1.20 | length 2102.9
  Top Layer w5.91: U1.20 1204.84,2480.16 v1(1205,2480) ; LED4.2 2590,1816.05 v1(2590,1865)
  Bottom Layer w5.91: v1(1205,2480) 2040,2480 2075,2445 2075,1890 2100,1865 v1(2590,1865)
SCL_1: IC1.6 IC3.6 R2.1 U1.12 | length 852.6
  Top Layer w5.91: U1.12 1025.43,2275.43 1010,2260 IC1.6 1010,2060 1020,2050 1266.54,2050 1270,2053.46 R2.1 1270,2110 1280,2120 1391.54,2120 1395,2116.54 1395,2098.46 1398.46,2095 IC3.6
SCL_2: H1.3 U1.15 | length 465.2
  Top Layer w5.91: v1(1050,2350) 1051.1,2351.1 1116.93,2351.1 U1.15
  Bottom Layer w5.91: H1.3 965,2365 980,2350 v1(1050,2350)
SDA_1: IC1.5 IC3.5 R3.1 U1.11 | length 674.8
  Top Layer w5.91: U1.11 1069.84,2249.84 1060,2240 IC1.5 1060,2090 1070,2080 1185,2080 R3.1 1185,2130 1200,2145 IC3.5
SDA_2: H1.2 U1.16 | length 518.9
  Top Layer w5.91: H1.2 865,2557.75 877.99,2544.77 980.23,2544.77 1000,2525 1000,2390 1012.2,2377.8 U1.16
pads on no net: RL1.2 RL2.2 RL3.2 RL4.2 U1.5 U1.6 U1.8 U1.10 U1.13 U1.14 U2.

## Polygon pours and split planes (outlines as drawn)
GND on Top Layer "GND_L01_P000" (solid, remove dead copper, pour order 0): 10,10 10,3465 2175,3465 2175,1970 3015,1970 3015,10
GND on Bottom Layer "GND_L02_P001" (solid, remove dead copper, pour order 1): 10,10 10,3465 2175,3465 2175,1970 3015,1970 3015,10

## Keep-outs
Keep-Out Layer:
  circle w10: c2850.66,190.05 r78.74
  circle w10: c1925,3190 r78.74
  lines w15: 10,10 10,3465 2175,3465 2175,1970 3015,1970 3015,10 10,10

## Other copper
Top Layer:
  pour cut-out: 2850.66,335.72 ccw(c2850.66,190.05) 2704.99,190.05 ccw(c2850.66,190.05) 2850.66,44.38 ccw(c2850.66,190.05) 2996.33,190.05 ccw(c2850.66,190.05)
  pour cut-out: 1925,3044.33 cw(c1925,3190) 1779.33,3190 cw(c1925,3190) 1925,3335.67 cw(c1925,3190) 2070.67,3190 cw(c1925,3190)
  pour cut-out: 395,770 815,770 815,1295 995,1295 1000,1290 1055,1290 1055,770 1500,770 1500,1305 1690,1305 1690,1295 1735,1295 1735,770 2155,770 2155,1310 2285,1310 2285,1300 2350,1300 2350,760 3010,760 3015,755 3015,10 10,10 10,1295 395,1295
  region net +5V: 2445,1310 2460,1310 2460,1260 2510,1210 2565,1210 2565,1055 2415,1055 2415,1230 2400,1245 2385,1245
  region net +5V: 2340,1475 2305,1475 2285,1455 2285,1330 2310,1305 2355,1305 2370,1290 2370,1245 2445,1245 2445,1310 2395,1310 2375,1330 2330,1330 2320,1340 2320,1430 2330,1440 2340,1440
  region net +5V: 1775,1245 1790,1230 1790,1045 1910,1045 1910,1215 1860,1215 1845,1230 1845,1245
  region net +5V: 1740,1475 1700,1475 1690,1465 1690,1325 1710,1305 1745,1305 1755,1295 1755,1255 1765,1245 1845,1245 1845,1305 1790,1305 1765,1330 1730,1330 1715,1345 1715,1435 1720,1440 1740,1440
  region net +5V: 1070,1245 1105,1210 1105,1045 1245,1045 1245,1195 1185,1195 1150,1230 1150,1245
  region net +5V: 1030,1335 1035,1335 1045,1325 1045,1320 1030,1320
  region net +5V: 1045.56,1460.56 1030,1445 1020,1455 1020,1467.86
  region net +5V: 1055,1490 1020,1490 1005,1475 1005,1310 1020,1295 1060,1295 1070,1285 1070,1245 1150,1245 1150,1305 1105,1305 1085,1325 1035,1325 1035,1460 1055,1460
  region net +5V: 415,1305 415,1080 450,1045 580,1045 580,1160 490,1160 470,1180 470,1305
  region net +5V: 430,1345 460,1345 460,1295 430,1295
  region net +5V: 1010,1565 1035,1565 1055,1545 1055,1460 1085,1460 1085,1620 1070,1635 1015,1635
  region net +5V: 2295,1565 2325,1565 2340,1550 2340,1440 2370,1440 2370,1620 2355,1635 2295,1635
  region net +5V: 1720,1580 1725,1570 1750,1545 1755,1550 1755,1575
  region net +5V: 1740,1440 1770,1440 1770,1625 1760,1635 1740,1635
  region net +5V: 380,1460 420,1460 420,1575 380,1575
  region net +5V: 2253.54,1635 2195,1635 2195,1565 2253.54,1565
  region net +5V: 1653.54,1635 1595,1635 1595,1565 1653.54,1565
  region net +5V: 965,1635 915,1635 915,1565 965,1565
  region net +5V: 550,2700 495,2645 495,1670 460,1635 260,1635 260,1565 485,1565 550,1630 550,2610 575,2635 760,2635 760,2655 700,2700
  region net NetIC3_3: 1745,2110 1745,2080 1595,2080 1570,2105 1570,2300 1530,2340 1330,2340 1330,2630 1485,2630 1485,2460 1510,2435 1630,2315 1630,2140 1660,2110
  region net NetIC3_3: 1485,2460 1585,2460 1630,2415 1630,2315
  region net +5V: 1380,2035 1400,2015 1400,2010 1360,2010
  region net +5V: 1505,2015 1385,2015 1365,2035 1335,2005 1360,1980 1505,1980
  region net +5V: 870,2105 885,2090 885,2010 895,2000 1380,2000 1380,2035 950,2035 925,2060 925,2105
  region net +5V: 760,2255 760,2120 775,2105 925,2105 925,2185 815,2185 795,2205 795,2255
  region net +5V: 816.25,2276.25 795,2255 793.75,2276.25
  region net +5V: 790,2300 805,2285 930,2285 930,2265 790,2265
  region net +5V: 795,2705 755,2705 760,2700 760,2255 795,2255
  region net +5V: 665,2850 665,2660 690,2635 800,2635 800,2705 735,2705 710,2730 710,2850
  region net +5V: 920,3070 680,3070 665,3055 665,2850 710,2850 710,2980 720,2990 920,2990
  region net NetC11_2: 665,3180 675,3170 915,3170 915,3250 720,3250 690,3280 690,3285 675,3285
  region net NetC11_2: 665,3380 665,3180 705,3180 705,3410 685,3430 400,3430 375,3405 375,3135 445,3135 445,3375 460,3390 655,3390
Bottom Layer:
  pour cut-out: 2850.66,335.72 ccw(c2850.66,190.05) 2704.99,190.05 ccw(c2850.66,190.05) 2850.66,44.38 ccw(c2850.66,190.05) 2996.33,190.05 ccw(c2850.66,190.05)
  pour cut-out: 1925,3044.33 cw(c1925,3190) 1779.33,3190 cw(c1925,3190) 1925,3335.67 cw(c1925,3190) 2070.67,3190 cw(c1925,3190)
  pour cut-out: 395,770 815,770 815,1295 995,1295 1000,1290 1055,1290 1055,770 1500,770 1500,1305 1690,1305 1690,1295 1735,1295 1735,770 2155,770 2155,1310 2285,1310 2285,1300 2350,1300 2350,760 3010,760 3015,755 3015,10 10,10 10,1295 395,1295
  region net +5V: 450,1615 430,1595 430,1315 460,1315 460,1575 470,1585 485,1585
  region net +5V: 450,1615 450,1585 2235,1585 2235,1615

## Silkscreen, mask and mechanical layers (free items; w line width, h text height)
Top Overlay:
  text "5V" at 789.04,2740 h80 r90
  text "SDA" at 884.04,2740 h80 r90
  text "SCL" at 984.04,2740 h80 r90
  text "GND" at 1089.04,2740 h80 r90
  text "I2C" at 705,2550.89 h80